# EAGLE board OpenLCD (EAGLE 7.2.0)
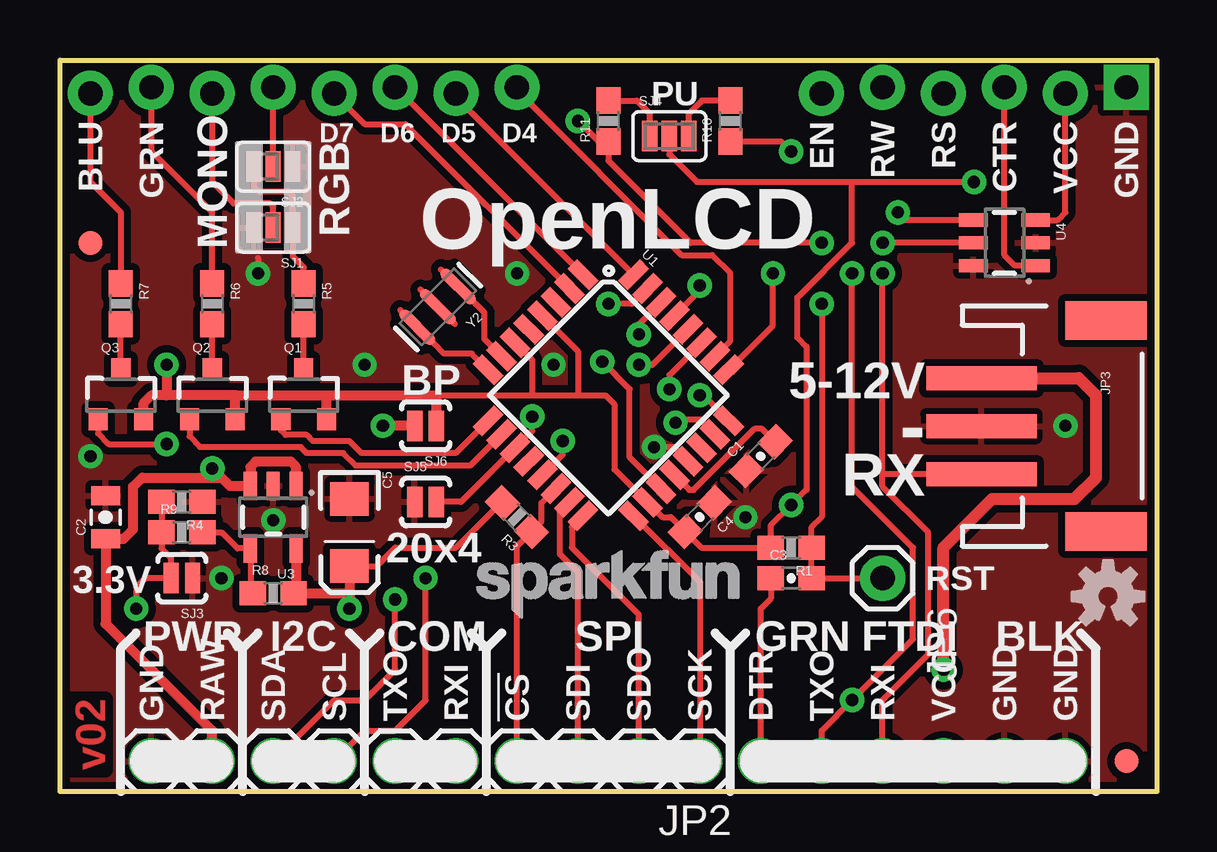
[diagram p0: board, top side]
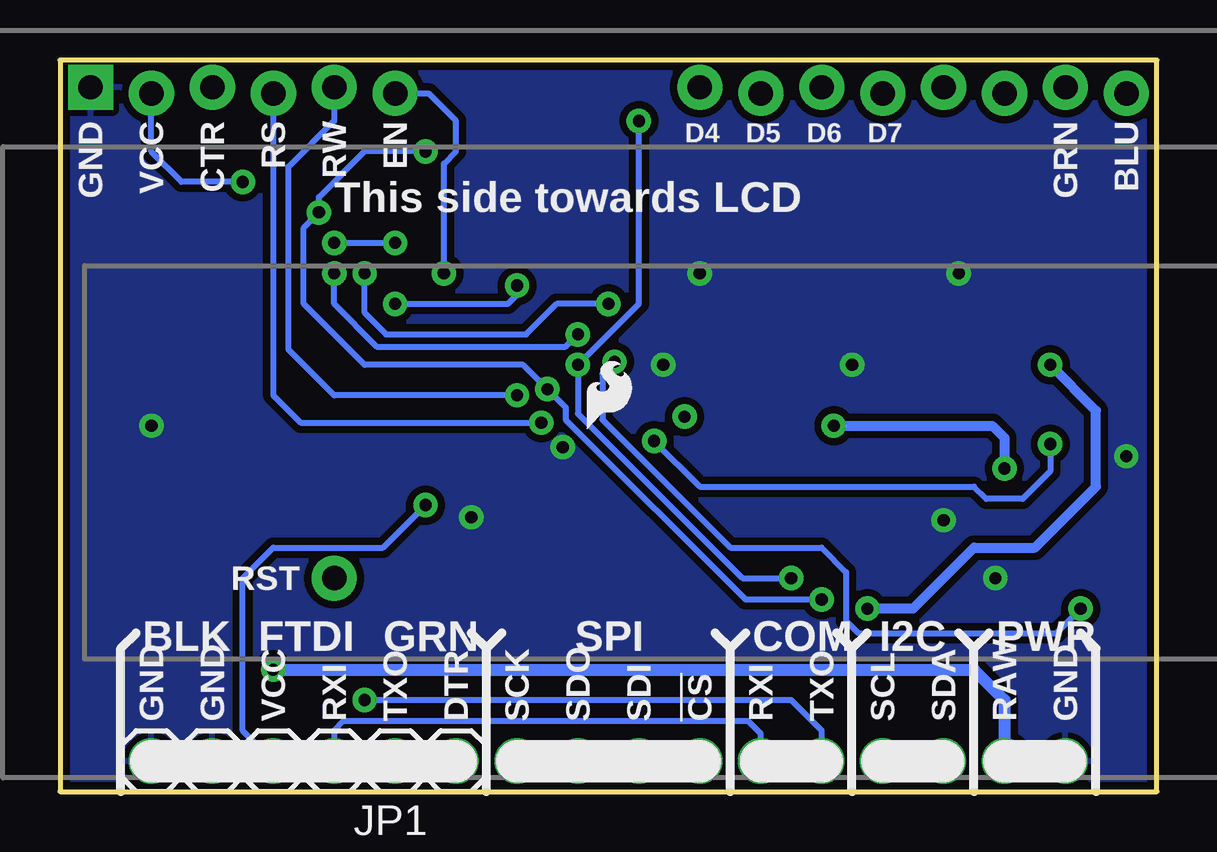
[diagram p1: board, bottom side, seen from below]

Size 45.72 x 30.48 mm. Coordinates in mm from the lower left corner, seen from the top.
Outline: 45.72,30.48 45.72,0 0,0 0,30.48 45.72,30.48
Copper layers (1*16): Top 0.035mm / dielectric 1.5mm / Bottom 0.035mm
Design rules "SparkFun-2-layer-STANDARD": minimum track width 10mil, minimum drill 20mil, track to track 10mil, track to pad 8mil, pad to pad 8mil, via to via 10mil, smd to smd 8mil, copper to edge 8mil, drill to drill 8mil, minimum pad ring 10mil, minimum via ring 10mil, stop-mask expansion 4mil, vias tented up to drill 20mil, thermal gap 10mil
Net classes: 0 default: width 0.203 mm

## Footprints (pad centres in the part's own frame; a part is rotated, then mirrored left to right if it is on the bottom)
0603-CAP = smd 1.1 x 1: 1 -0.85,0; 2 0.85,0
0805-CAP = smd 0.8 x 1.2: 1 -0.9,0; 2 0.9,0
EIA3216 = smd 1.4 x 1.6: A 1.4,0; C -1.4,0
FIDUCIAL-1X2 = smd 1 x 1: 1 0,0
FTDI_BASIC = drill 1.016 pad 1.88: CTS 10.16,0; DTR 0,0; GND 12.7,0; RXI 2.54,0; TXO 5.08,0; VCC 7.62,0
1X10 = drill 1.016 pad 1.88: 1 0,0; 2 2.54,0; 3 5.08,0; 4 7.62,0; 5 10.16,0; 6 12.7,0; 7 15.24,0; 8 17.78,0; 9 20.32,0; 10 22.86,0
JST-3-SMD = smd 1 x 4.6: 1 -1.99,-4.77; 2 0.01,-4.77; 3 2.01,-4.77 | smd 1.6 x 3.4: NC1 -4.39,0.43; NC2 4.41,0.43
1X01 = drill 1.016 pad 1.88: 1 0,0
SOT23-3 = smd 0.8 x 0.9: 1 -0.95,-1; 2 0.95,-1; 3 0,1.1
0603-RES = smd 1.1 x 1: 1 -0.85,0; 2 0.85,0
PAD-JUMPER-3-2OF3_NC_BY_PASTE_YES_SILK_FULL_BOX = smd 0.635 x 1.27: 1 -0.813,0; 2 0,0; 3 0.813,0
PAD-JUMPER-2-NO_YES_SILK = smd 0.635 x 1.27: 1 -0.45,0; 2 0.45,0
PAD-JUMPER-3-NC_BY_PASTE_YES_SILK_FULL_BOX = smd 0.635 x 1.27: 1 -0.813,0; 2 0,0; 3 0.813,0
PAD.03X.04 = smd 1.016 x 1.016: P$1 0,0
TQFP32-08 = smd 1.27 x 0.559: 1 -4.293,2.8; 2 -4.293,2; 3 -4.293,1.2; 4 -4.293,0.4; 5 -4.293,-0.4; 6 -4.293,-1.2; 7 -4.293,-2; 8 -4.293,-2.8; 17 4.293,-2.8; 18 4.293,-2; 19 4.293,-1.2; 20 4.293,-0.4; 21 4.293,0.4; 22 4.293,1.2; 23 4.293,2; 24 4.293,2.8 | smd 0.559 x 1.27: 9 -2.8,-4.293; 10 -2,-4.293; 11 -1.2,-4.293; 12 -0.4,-4.293; 13 0.4,-4.293; 14 1.2,-4.293; 15 2,-4.293; 16 2.8,-4.293; 25 2.8,4.293; 26 2,4.293; 27 1.2,4.293; 28 0.4,4.293; 29 -0.4,4.293; 30 -1.2,4.293; 31 -2,4.293; 32 -2.8,4.293
LCD-16X2_NOSILK-KIT-4BIT = drill 1.016 pad 1.88 square: 1 -32,15.627 | drill 1.016 pad 1.88: 2 -29.46,15.373; 3 -26.92,15.627; 4 -24.38,15.373; 5 -21.84,15.627; 6 -19.3,15.373; 11 -6.6,15.627; 12 -4.06,15.373; 13 -1.52,15.627; 14 1.02,15.373; 15 3.56,15.627; 16 6.1,15.373; 17 8.64,15.627; 18 11.18,15.373
SOT23-5 = smd 0.55 x 1.2: 1 -0.95,-1.3; 2 0,-1.3; 3 0.95,-1.3; 4 0.95,1.3; 5 -0.95,1.3
SOT23-6 = smd 0.55 x 1.2: 1 0.95,1.3; 2 0,1.3; 3 -0.95,1.3; 4 -0.95,-1.3; 5 0,-1.3; 6 0.95,-1.3
RESONATOR-SMD = smd 0.45 x 1.905: 1 -1.2,0; 2 0,0; 3 1.2,0

## Placement (x,y rotation side)
C1  0.1uF  [0603-CAP]  29.21,13.97 45 top
C2  1.0uF/25V  [0805-CAP]  1.91,11.43 90 top
C3  0.1uF  [0603-CAP]  30.48,8.89 0 top
C4  0.1uF  [0603-CAP]  26.67,11.43 225 top
C5  10uF  [EIA3216]  12.06,10.79 270 top
FID1  FIDUCIAL1X2  [FIDUCIAL-1X2]  1.27,22.86 0 top
FID2  FIDUCIAL1X2  [FIDUCIAL-1X2]  44.45,1.27 0 top
FRAME1  FRAME-LEDGER  [CREATIVE_COMMONS]  -7.62,-13.97 0 top  (outside the outline)
JP1  FTDI_BASIC  [FTDI_BASIC]  29.21,1.27 180 bottom
JP2  Connections  [1X10]  26.67,1.27 180 top
JP3  3-PIN SMD  [JST-3-SMD]  43.18,15.24 270 top
JP6  RESET  [1X01]  34.29,8.89 270 top
LOGO3  SFE_LOGO_NAME.1_INCH  [SFE_LOGO_NAME_.1]  16.89,6.73 0 top
LOGO4  SFE_LOGO_FLAME.1_STOP  [SFE_LOGO_FLAME_STOP_.1]  3.3,21.21 0 top
Q1  PNP-500mA  [SOT23-3]  10.16,16.51 0 top
Q2  PNP-500mA  [SOT23-3]  6.35,16.51 0 top
Q3  PNP-500mA  [SOT23-3]  2.54,16.51 0 top
R1  10K  [0603-RES]  30.48,10.16 180 top
R3  10K  [0603-RES]  19.05,11.43 135 top
R4  330  [0603-RES]  5.08,12.06 180 top
R5  240  [0603-RES]  10.16,20.32 270 top
R6  240  [0603-RES]  6.35,20.32 270 top
R7  240  [0603-RES]  2.54,20.32 270 top
R8  240  [0603-RES]  8.89,8.26 0 top
R9  390  [0603-RES]  5.08,10.79 0 top
R10  4.7K  [0603-RES]  27.94,27.94 90 top
R11  4.7K  [0603-RES]  22.86,27.94 90 top
SJ1  [PAD-JUMPER-3-2OF3_NC_BY_PASTE_YES_SILK_FULL_BOX]  8.89,23.5 180 top
SJ2  [PAD-JUMPER-3-2OF3_NC_BY_PASTE_YES_SILK_FULL_BOX]  8.89,26.04 180 top
SJ3  3.3V  [PAD-JUMPER-2-NO_YES_SILK]  5.08,8.89 180 top
SJ4  I2C-PU  [PAD-JUMPER-3-NC_BY_PASTE_YES_SILK_FULL_BOX]  25.4,27.3 0 top
SJ5  Size  [PAD-JUMPER-2-NO_YES_SILK]  15.24,12.06 0 top
SJ6  Bypass  [PAD-JUMPER-2-NO_YES_SILK]  15.24,15.24 180 top
TP1  [PAD.03X.04]  3.17,7.62 0 bottom
TP2  [PAD.03X.04]  19.68,15.62 0 bottom
U1  ATMEGA328P_TQFP  [TQFP32-08]  22.86,16.51 315 top
U2  4BIT-RGB  [LCD-16X2_NOSILK-KIT-4BIT]  12.45,13.72 0 bottom
U3  MIC5205-ADJ  [SOT23-5]  8.89,11.43 180 top
U4  MCP4725  [SOT23-6]  39.37,22.86 270 top
U$1  LOGO-SFESK  [SFE-LOGO-FLAME]  23.75,15.11 0 bottom
U$4  OSHW-LOGOS  [OSHW-LOGO-S]  43.69,8.13 0 top
Y2  8MHZ  [RESONATOR-SMD]  15.75,20.19 225 top

## Library data of the parts
C1 C3 C4 = SparkFun-Capacitors; PROD_ID: CAP-00810
C2 = SparkFun-Capacitors; PROD_ID: CAP-11625
C5 = SparkFun-Capacitors; PROD_ID: CAP-00811
FID1 FID2 LOGO3 LOGO4 U$4 = SparkFun-Aesthetics
FRAME1 = SparkFun-Aesthetics; DESIGNER: N. Seidle; VERSION: 01
JP1 U$1 = SparkFun
JP2 = SparkFun-Connectors; PROD_ID: CONN-11563
JP3 = SparkFun-Connectors; PROD_ID: CONN-12591
JP6 = SparkFun-Connectors
Q1-Q3 = SparkFun-DiscreteSemi; PROD_ID: TRANS-11479
R1 R3 = SparkFun-Resistors; PROD_ID: RES-00824
R4 = SparkFun-Resistors; PROD_ID: RES-00818
R5-R8 = SparkFun-Resistors; PROD_ID: RES-07849
R9 = SparkFun-Resistors; PROD_ID: RES-07864
R10 R11 = SparkFun-Resistors; PROD_ID: RES-07857
SJ1-SJ6 TP1 TP2 = SparkFun-Passives
U1 = SparkFun-DigitalIC; PROD_ID: IC-09069
U2 = SparkFun-Displays
U3 = SparkFun-PowerIC; PROD_ID: VREG-12594
U4 = SparkFun-AnalogIC; PROD_ID: IC-08886
Y2 = SparkFun-FreqCtrl; PROD_ID: XTAL-08895

## Nets
3V-JUMPER: R4.2 R9.1 SJ3.2 TP1.P$1 U1.19
!CS: JP2.4 R3.1 U1.14
A-BLUE: R7.1 U2.18
A-GREEN: R6.1 U2.17
AREF: C1.2 U1.20
BACKLIGHT1: SJ2.2 U2.15
BACKLIGHT2: SJ1.2 U2.16
BL-B: Q3.1 U1.13
BL-G: Q2.1 U1.10
BL-R/W: Q1.1 U1.9
CONTRAST: U2.3 U4.1
D4: U1.26 U2.11
D5: U1.32 U2.12
D6: U1.1 U2.13
D7: U1.2 U2.14
DTR: C3.1 JP1.DTR
EN: U1.25 U2.6
GND: C1.1 C2.2 C4.1 C5.C JP1.CTS JP1.GND JP2.10 JP3.2 R4.1 SJ1.3 SJ2.1 SJ3.1 SJ5.1 U1.3 U1.5 U1.21 U2.1 U3.2 U4.2 U4.6 Y2.2
MONO/RED: R5.1 SJ1.1 SJ2.3
N$1: Q1.3 R5.2
N$2: U1.8 Y2.3
N$3: U1.7 Y2.1
N$4: Q2.3 R6.2
N$5: Q3.3 R7.2
N$6: R8.1 R9.2 U3.4
N$9: R11.2 SJ4.1
N$10: R10.2 SJ4.3
R/W: U1.24 U2.5
RAW [vcc]: C2.1 JP2.9 JP3.1 SJ6.2 U3.1 U3.3
RS: U1.23 U2.4
RST: C3.2 JP6.1 R1.1 U1.29
RXI: JP1.TXO JP2.5 JP3.3 U1.30
SCK: JP2.1 U1.17
SCL: JP2.7 R11.1 U1.28 U4.5
SDA: JP2.8 R10.1 U1.27 U4.4
SDI: JP2.3 U1.15
SDO: JP2.2 U1.16
SIZE: SJ5.2 TP2.P$1 U1.11
TXO: JP1.RXI JP2.6 U1.31
VCC: C4.2 C5.A JP1.VCC Q1.2 Q2.2 Q3.2 R1.2 R3.2 R8.2 SJ4.2 SJ6.1 U1.4 U1.6 U1.18 U2.2 U3.5 U4.3

## Tracks (layer width: path | path; a pad name or v marks a point on that pad's centre or on a via)
3V-JUMPER  (via drill 0.51)
  Top 0.254: R4.2 R9.1 4.23,10.12 4.63,9.72 SJ3.2 3.56,8.89 3.17,8.51 TP1.P$1 | U1.19 23.75,13.92 23.75,16.76 v22.61,17.91
  Bottom 0.254: TP1.P$1 4.19,6.6 12.45,6.6 12.95,7.11 12.95,9.14 13.97,10.16 17.78,10.16 23.11,15.49 23.11,17.4 v22.61,17.91
  other vias: 3.17,7.62
!CS
  Top 0.254: U1.14 20.07,12.02 20.07,11.24 R3.1 19.05,10.23 JP2.4
A-BLUE
  Top 0.254: R7.1 2.54,24.13 1.27,25.4 U2.18
A-GREEN
  Top 0.254: R6.1 6.35,24.13 3.81,26.67 U2.17
AREF
  Top 0.254: C1.2 29.27,15.11 28.96,15.11 26.42,12.57 26.23,12.57 U1.20
BACKLIGHT1
  Top 0.254: SJ2.2 U2.15
BACKLIGHT2
  Top 0.254: SJ1.2 8.89,24.38 8.76,24.51 7.24,24.51 6.35,25.4 U2.16
BL-B  (via drill 0.51)
  Top 0.254: v4.45,14.48 2.03,14.48 1.59,14.92 Q3.1 | U1.13 20.95,14.04 v20.95,14.61
  Bottom 0.254: v4.45,14.48 4.45,13.34 5.59,12.19 7.11,12.19 7.62,12.7 19.05,12.7 v20.95,14.61
BL-G
  Top 0.254: U1.10 17.11,13.59 12.32,13.59 11.81,14.1 10.29,14.1 10.03,14.35 5.84,14.35 5.4,14.79 Q2.1
BL-R/W
  Top 0.254: Q1.1 9.21,15.05 9.4,14.86 10.29,14.86 10.54,14.61 12.06,14.61 12.57,14.1 16.49,14.1 U1.9
CONTRAST
  Top 0.254: U4.1 39.81,21.91 39.37,22.35 U2.3
D4
  Top 0.254: U1.26 27.94,18.76 27.94,21.59 27.18,22.35 25.91,22.35 19.05,29.21 U2.11
D5
  Top 0.254: U1.32 16.51,28.93 U2.12
D6
  Top 0.254: U1.1 13.99,29.34 U2.13
D7
  Top 0.254: U1.2 14.38,27.81 12.7,27.81 U2.14
DTR
  Top 0.254: JP1.DTR 29.21,7.62 29.63,8.04 C3.1
EN  (via drill 0.51)
  Top 0.254: v29.72,21.59 29.72,19.41 U1.25
  Bottom 0.254: v29.72,21.59 29.72,26.16 29.21,26.67 29.21,27.94 30.36,29.09 U2.6
GND  (via drill 0.51)
  Top 0.254: U1.21 25.59,14.35 v24.77,14.35 | 8.26,22.23 v8.26,21.59
  other vias: 12.7,17.78 6.73,8.89 28.57,11.43 20.57,17.78 41.91,15.24 8.89,11.3 1.27,13.97 19.05,21.59
  pour Top (isolate 0.305): 0,0 0,30.48 45.72,30.48 45.72,0
  pour Bottom (isolate 0.305): 0,0 0,30.48 45.72,30.48 45.72,0
MONO/RED
  Top 0.254: SJ2.3 8.08,25.2 8.26,25.02 9.53,25.02 9.7,24.84 SJ1.1 9.7,22.3 10.16,21.84 R5.1
N$1
  Top 0.254: Q1.3 R5.2
N$2
  Top 0.254: U1.8 17.16,18.25 16,18.25 15.62,18.63
N$3
  Top 0.254: U1.7 17.7,18.85 17.7,19.94 17.32,20.32
N$4
  Top 0.254: Q2.3 R6.2
N$5
  Top 0.254: Q3.3 R7.2
N$6
  Top 0.254: R9.2 6.73,10.79 7.4,10.13 U3.4 7.94,8.36 R8.1
N$9
  Top 0.254: SJ4.1 24.59,28.25 24.04,28.79 R11.2
N$10
  Top 0.254: SJ4.3 26.21,28.25 26.76,28.79 R10.2
R/W  (via drill 0.51)
  Top 0.254: U1.24 26.82,16.51 v26.67,16.51
  Bottom 0.254: v26.67,16.51 34.29,16.51 36.2,18.41 36.2,26.04 34.29,27.94 U2.5
RAW  (via drill 0.51)
  Top 0.406: U3.1 9.84,13.53 9.63,13.74 8.15,13.74 7.94,13.53 U3.3 7.08,12.73 6.73,13.08 6.35,13.08 | 6.35,13.08 3.43,13.08 3.05,12.7 3.05,10.92 2.66,10.53 C2.1 1.91,6.99 6.35,2.54 JP2.9 | SJ6.2 v13.46,15.24 | v6.35,13.46 6.35,13.08
  Top 0.508: JP3.1 42.46,17.23 43.18,16.51 43.18,13.08 42.29,12.19 38.86,12.19 36.83,10.16 v36.83,5.08
  Bottom 0.406: v13.46,15.24 6.86,15.24 6.35,14.73 v6.35,13.46
  Bottom 0.508: v36.83,5.08 7.62,5.08 6.35,3.81 JP2.9
RS  (via drill 0.51)
  Top 0.254: v25.65,15.37 25.78,15.49 26.7,15.49 U1.23
  Bottom 0.254: U2.4 36.83,16.51 35.69,15.37 v25.65,15.37
RST  (via drill 0.51)
  Top 0.254: JP6.1 C3.2 R1.1 31.33,11.01 31.75,11.43 v31.75,20.32 | U1.29 26.67,20.89 v26.67,21.08
  Bottom 0.254: v26.67,21.08 26.67,20.7 27.05,20.32 v31.75,20.32
RXI  (via drill 0.51)
  Top 0.254: 34.29,13.21 34.31,13.23 JP3.3 | 34.29,13.21 v34.29,21.59 | U1.30 24.13,19.48 v24.13,19.05 | JP1.TXO 34.29,3.81 36.2,5.71 36.2,10.79 34.29,12.7 34.29,13.21
  Bottom 0.254: JP1.TXO 34.29,2.54 33.91,2.92 17.02,2.92 16.51,2.41 JP2.5 | v34.29,21.59 34.29,20.32 32.51,18.54 24.64,18.54 v24.13,19.05
SCK
  Top 0.254: U1.17 26.67,8.74 JP2.1
SCL  (via drill 0.51)
  Top 0.254: U1.28 24.7,17.78 v24.13,17.78 | v15.24,8.89 15.24,3.81 13.97,2.54 12.7,2.54 JP2.7 | v21.59,27.94 22.44,27.09 R11.1 22.86,26.29 26.29,22.86 v31.75,22.86 | U4.5 v34.29,22.86
  Bottom 0.254: v21.59,27.94 21.59,20.32 v24.13,17.78 24.13,15.75 17.27,8.89 v15.24,8.89 | v34.29,22.86 v31.75,22.86
SDA  (via drill 0.51)
  Top 0.254: U1.27 25.4,17.35 v25.4,16.76 | R10.1 30.06,27.09 v30.48,26.67 | JP2.8 11.43,3.81 12.7,3.81 13.97,5.08 v13.97,8 | U4.4 35.24,23.81 v34.92,24.13
  Bottom 0.254: v30.48,26.67 33.02,26.67 34.92,24.77 v34.92,24.13 35.56,23.5 35.56,20.32 33.02,17.78 26.42,17.78 v25.4,16.76 24.64,16 24.64,15.49 17.14,8 v13.97,8
SDI
  Top 0.254: U1.15 20.83,11.65 20.83,9.91 21.59,9.14 JP2.3
SDO
  Top 0.254: U1.16 21.34,11.03 21.34,10.16 24.13,7.37 JP2.2
SIZE  (via drill 0.51)
  Top 0.254: SJ5.2 16.72,12.06 U1.11 19.68,15.03 TP2.P$1
  other vias: 19.68,15.62
TXO  (via drill 0.51)
  Top 0.254: JP1.RXI 31.75,2.54 v33.02,3.81 35.56,6.35 35.56,10.16 33.02,12.7 v33.02,21.59 | U1.31 23.84,20.32 v22.86,20.32
  Bottom 0.254: v33.02,3.81 15.24,3.81 13.97,2.54 JP2.6 | v33.02,21.59 33.02,19.94 32.13,19.05 26.29,19.05 25.02,20.32 v22.86,20.32
VCC  (via drill 0.51)
  Top 0.254: 7.3,16.44 7.37,16.51 | 11.11,16.45 11.05,16.51 | 21.59,16.51 21.59,18.35 U1.4 | R3.2 18.38,12.03 16.51,10.16 13.97,10.16 13.21,9.39 C5.A | SJ4.2 25.4,26.54 26.54,25.4 33.02,25.4 | 15.69,16.45 15.75,16.51 19.68,16.51 | 33.02,25.4 v38.1,25.4 | 41.94,29.05 U2.2 41.91,24.13 41.59,23.81 U4.3 | 33.02,25.4 33.02,22.86 30.73,20.57 30.73,18.92 31.11,18.54 31.11,12.57 v30.48,11.94 29.63,11.09 R1.2 26.74,10.16 C4.2 25.47,11.43 25.11,11.43 U1.18 23.11,13.43 23.11,16.13 22.73,16.51 21.59,16.51 | 19.68,16.51 21.59,16.51 | U1.6 19.68,17.99 19.68,16.51
  Top 0.406: 4.45,16.51 7.37,16.51 11.05,16.51 15.75,16.51 | 4.45,16.51 3.81,16.51 3.49,16.19 Q3.2 | Q1.2 11.11,16.45 | Q2.2 7.3,16.44 | v4.45,17.78 4.45,16.51 | SJ6.1 15.69,16.45 | C5.A 12.06,8.38 | 12.06,8.38 v12.06,7.62 | 12.06,8.38 11.94,8.26 R8.2 9.84,8.36 U3.5
  Bottom 0.254: JP1.VCC 38.1,2.54 38.1,8.89 36.83,10.16 32.26,10.16 v30.48,11.94 | v38.1,25.4 40.65,25.4 41.91,26.66 U2.2
  Bottom 0.406: v4.45,17.78 2.54,15.88 2.54,12.7 5.08,10.16 7.62,10.16 10.16,7.62 v12.06,7.62

## Text on the board
Top: v02
tPlace: PU | BLU | GRN | EN | RW | RS | CTR | VCC | GND | D7 | D6 | D5 | D4 | MONO | RGB | OpenLCD | 5-12V | BP | - | RX | 20x4 | 3.3V | RST | PWR | I2C | COM | SPI | GRN | FTDI | BLK | GND | RAW | SDA | SCL | TXO | RXI | !CS | SDI | SDO | SCK | DTR | TXO | RXI | VCC | GND | GND
bPlace: BLU | GRN | EN | RW | RS | CTR | VCC | GND | D7 | D6 | D5 | D4 | This side towards LCD | RST | PWR | I2C | COM | SPI | GRN | FTDI | BLK | GND | RAW | SDA | SCL | TXO | RXI | !CS | SDI | SDO | SCK | DTR | TXO | RXI | VCC | GND | GND
Measures: All dimensions are in inches.
tDocu: N. Seidle